# Allegro board ANALYSIS.brd
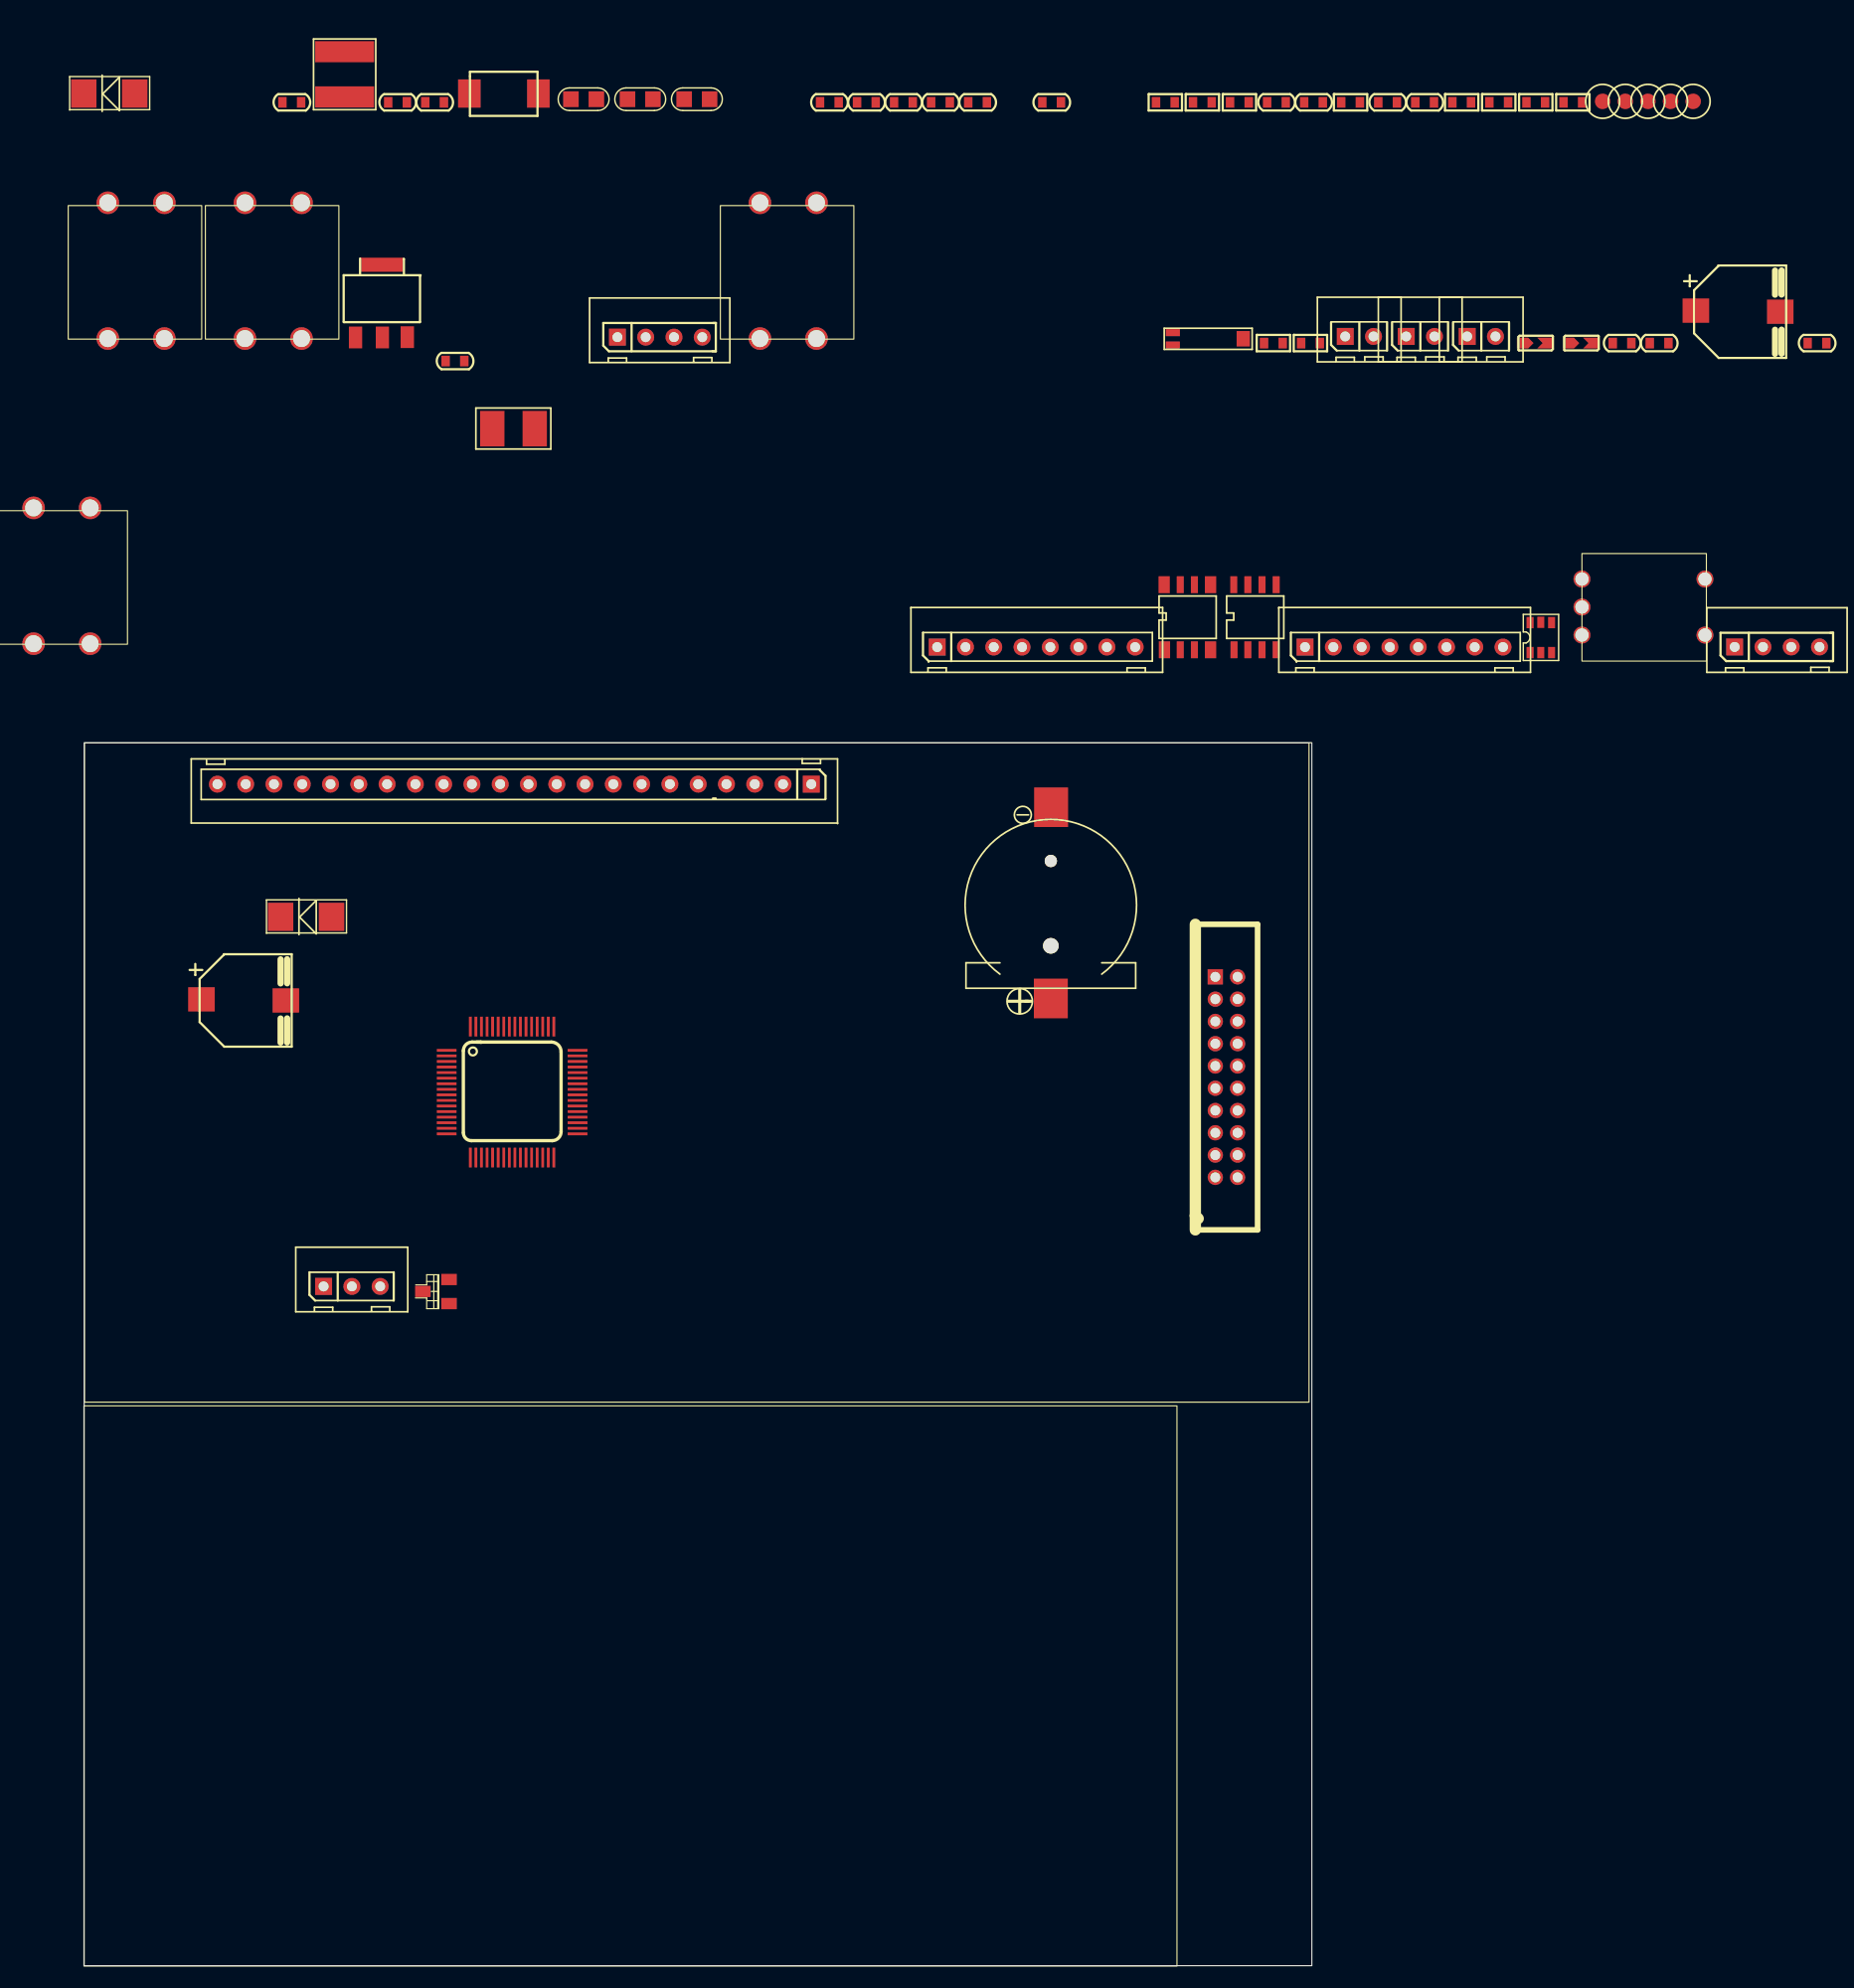
[diagram p0: board, top side]
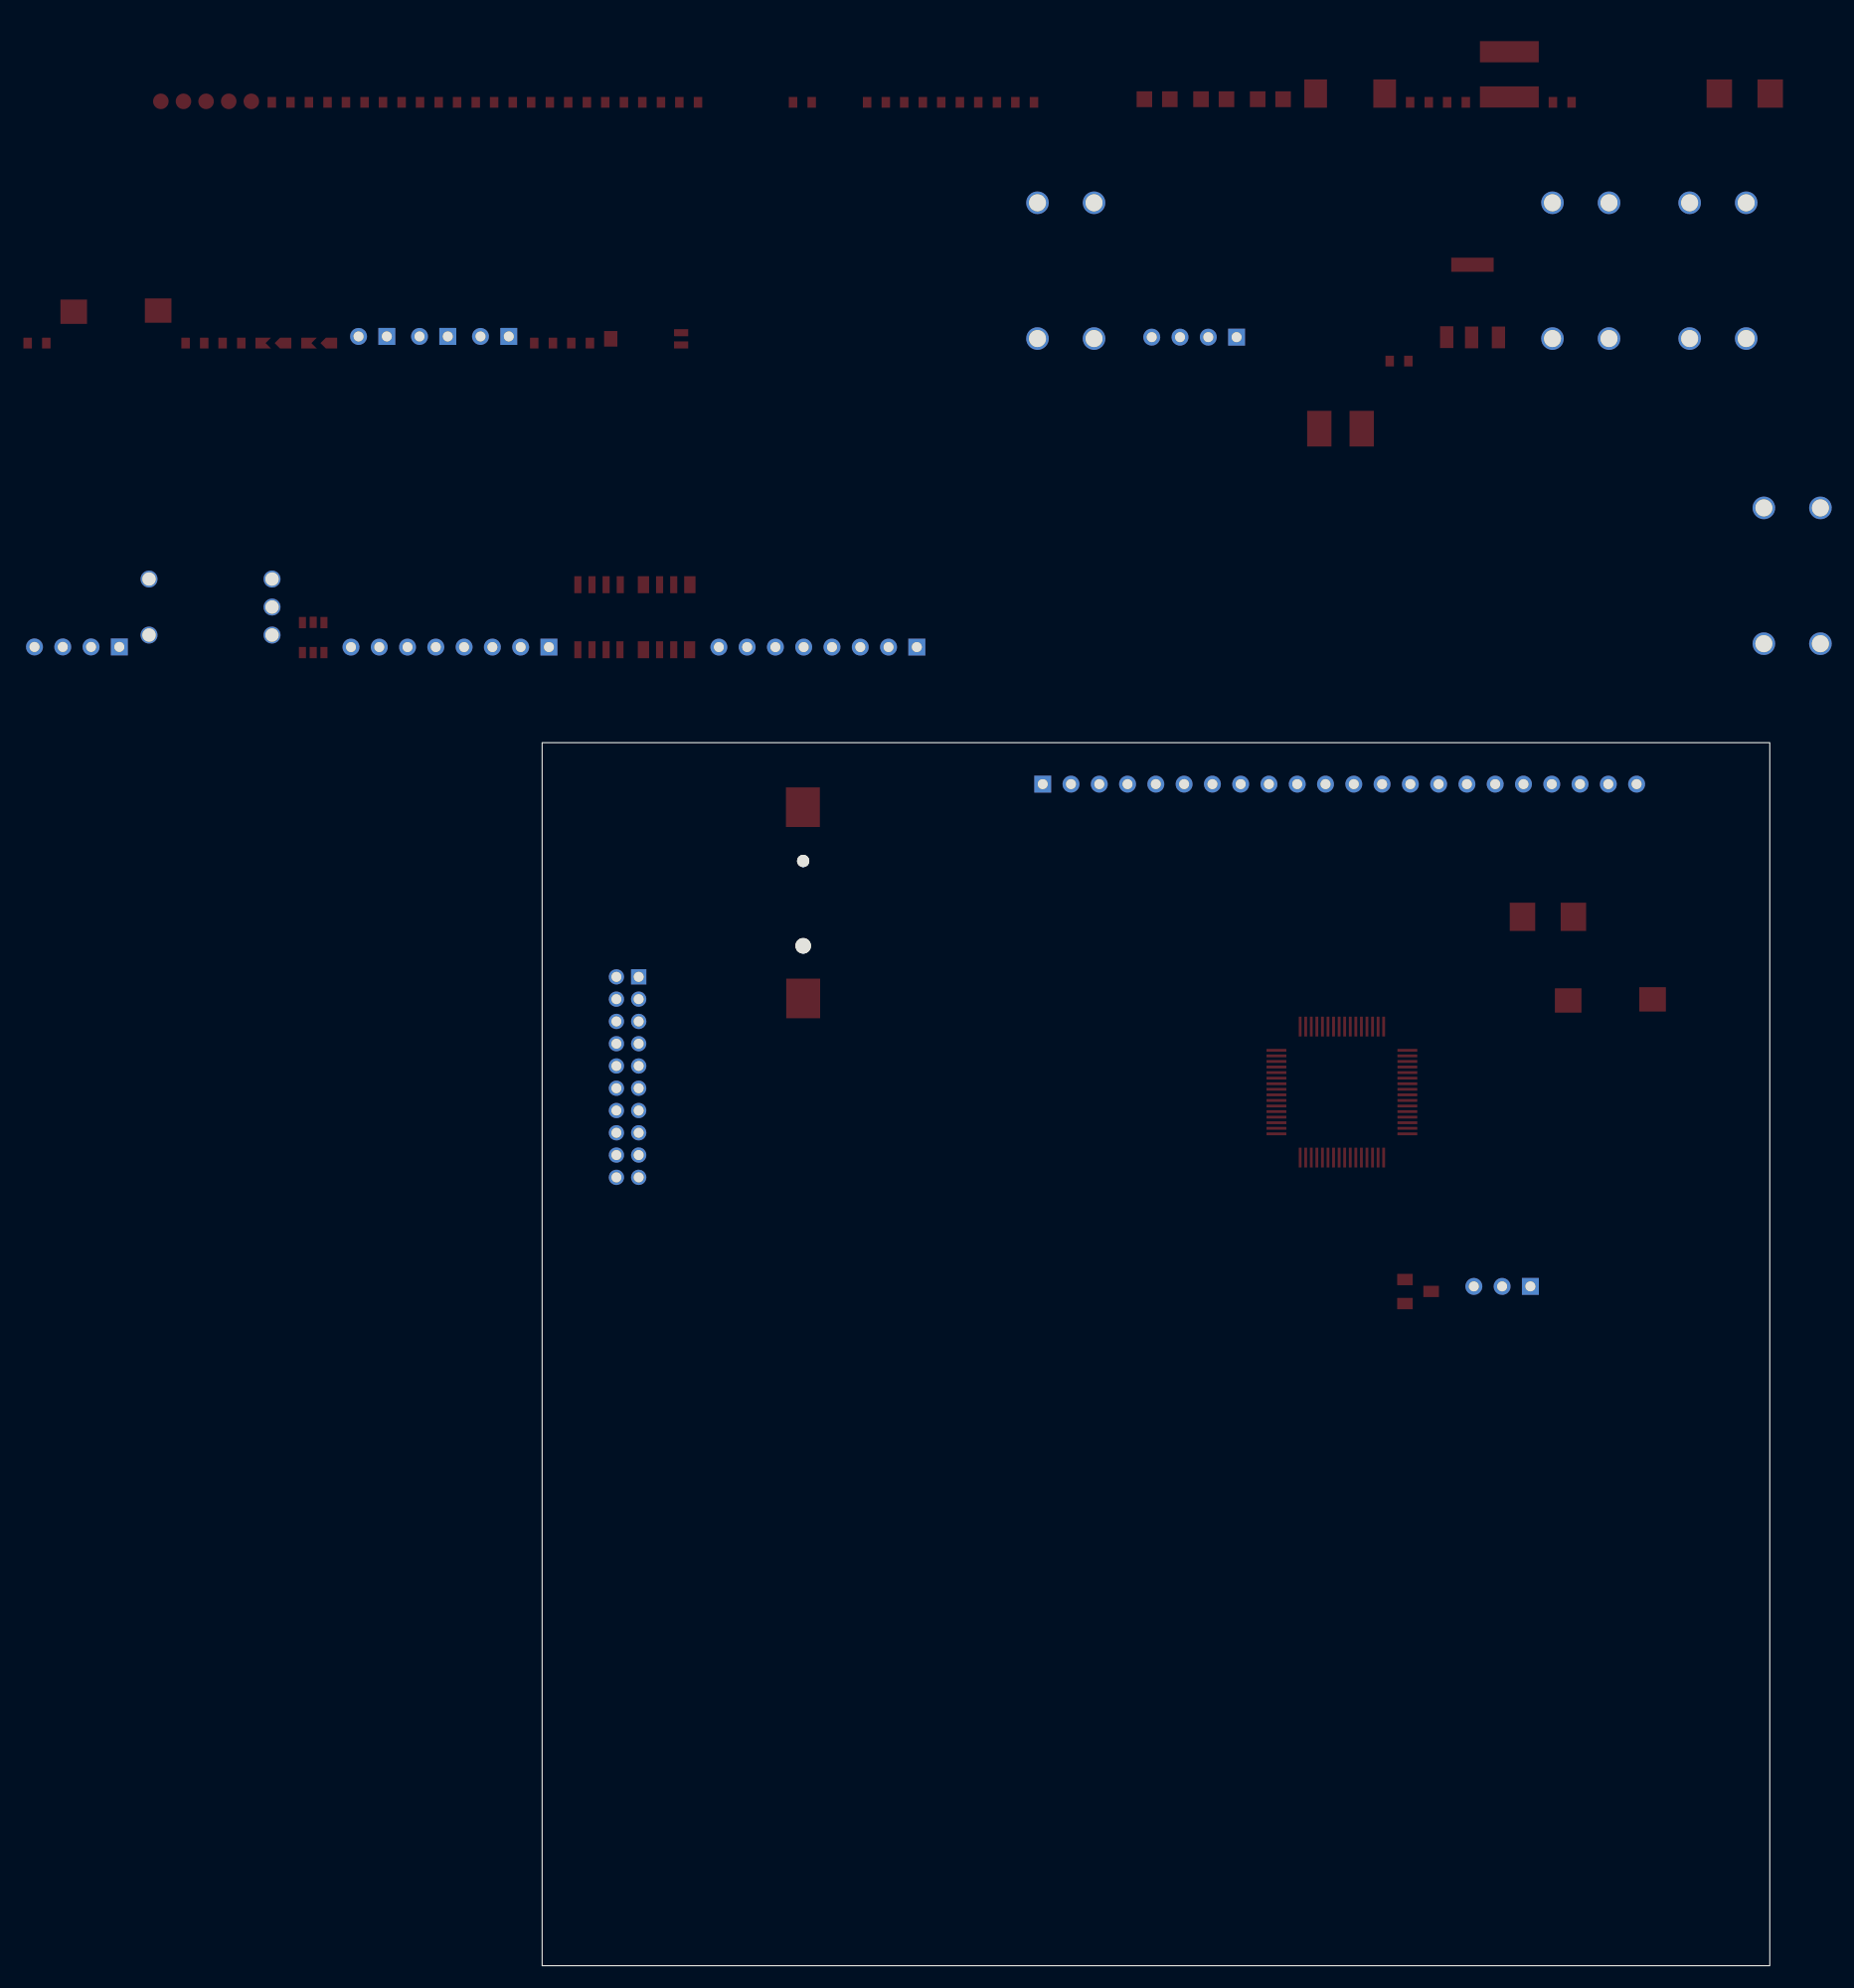
[diagram p1: board, bottom side, seen from below]

Outline 110.26 x 109.8 mm; copper layers: TOP, BOTTOM. Coordinates in mm from the lower left corner of the outline.
Outline path: rectangle 0,0 110.26,109.8

## Placement (name value [footprint] x y rotation side)
C1  0.1uF  [C0603]  70.25 167.3 0 top
C2  0.1uF  [C0603]  86.89 167.3 0 top
C3  0.1uF  [C0603]  18.64 167.3 0 top
C4  0.1uF  [C0603]  110.41 167.3 0 top
C5  0.1uF  [C0603]  28.14 167.3 0 top
C6  0.1uF  [C0603]  31.47 167.3 0 top
C7  15pF  [C0603]  117.06 167.3 0 top
C8  15pF  [C0603]  120.39 167.3 0 top
C9  0.1uF  [C0603]  66.92 167.3 0 top
C10  0.1uF  [C0603]  73.58 167.3 0 top
C11  0.1uF  [C0603]  107.08 167.3 0 top
C12  0.1uF  [C0603]  76.91 167.3 0 top
C13  5pF  [C0603]  141.45 145.68 0 top
C14  5pF  [C0603]  138.12 145.68 0 top
C15  220uf/35V  [CAP_SMD_8X10D5]  12.35 91.71 0 top
C16  0.1uF  [C0603]  80.23 167.3 0 top
C17  220uf/35V  [CAP_SMD_8X10D5]  146.57 153.55 0 top
C18  0.1uF  [C0603]  33.3 144.07 0 top
C19  10uF  [C0805]  44.85 167.58 0 top
C20  10uF  [C0805]  49.94 167.58 0 top
C21  10uF  [C0805]  55.03 167.58 0 top
C22  0.1uF  [C0603]  155.63 145.68 0 top
D1  BAT54C  [SOT23-3]  31.6 60.54 0 top
D2  SMBJ12A  [SMA]  2.25 168.08 0 top
D3  SS34  [SMA]  19.93 94.17 0 top
J1  HEADER 8  [XH-8A]  76.61 118.4 0 top
J2  HEADER 5  [SW3_2]  134.52 124.5 0 top
J3  -  [XH-2A]  124.21 146.28 0 top
J4  HEADER 20X2  [HEADER10X2_2MMP]  102.59 79.78 0 top
J5  HEADER 2  [XH-2A]  113.26 146.28 0 top
J6  0  [DEBUG0603_V1]  130.18 145.68 0 top
J7  0  [DEBUG0603_V1]  134.3 145.68 0 top
J8  HEADER 8  [XH-8A]  109.65 118.4 0 top
J9  LCD  [XH-22A]  62.36 119.33 180 top
JP_1  -  [XH-2A]  118.74 146.28 0 top
JP_SWD1  -  [XH-4A]  47.89 146.22 0 top
JS_BAT1  BAT  [CR1220_SOCKET_V1]  86.82 95.12 0 top
JS_USART1  NC/XH-4A  [XH-4A]  148.24 118.4 0 top
KS_REST  KEY_3x6x2d5_2p_SMD  [KEY_3X6X2D5_2P_SMD]  37.64 168.26 0 top
L1  47UH  [CD54]  23.39 169.81 0 top
R1  220K  [R0603]  110.13 145.68 0 top
R2  10K  [R0603]  127.05 167.3 0 top
R3  10K  [R0603]  130.37 167.3 0 top
R4  10K  [R0603]  100.43 167.3 0 top
R5  10K  [R0603]  97.1 167.3 0 top
R6  10K  [R0603]  133.7 167.3 0 top
R7  10K  [R0603]  103.75 167.3 0 top
R8  10R  [R0603]  106.81 145.68 0 top
R9  10k  [XH-3A]  21.5 60.99 0 top
R10  10K  [R0603]  113.74 167.3 0 top
R11  10K  [R0603]  123.72 167.3 0 top
SW1  SW PUSHBUTTON_0  [SW4L]  14.44 158.28 0 top
SW2  SW PUSHBUTTON_0  [SW4L]  2.12 158.28 0 top
SW3  SW PUSHBUTTON_0  [SW4L]  -4.55 130.89 0 top
SW4  SW PUSHBUTTON_0  [SW4L]  60.69 158.28 0 top
T1  NC/TEST  [TEST_55C_SMD]  140.44 167.39 0 top
T2  NC/TEST  [TEST_55C_SMD]  142.48 167.39 0 top
T3  NC/TEST  [TEST_55C_SMD]  144.51 167.39 0 top
T4  NC/TEST  [TEST_55C_SMD]  138.41 167.39 0 top
T5  NC/TEST  [TEST_55C_SMD]  136.38 167.39 0 top
U1  USBLC6-2SC6  [SOT23-6]  130.82 119.24 0 top
U2  STM32F103RB  [LQFP64]  38.43 78.44 0 top
U3  PCF8563T  [SOP8]  97.17 118.4 0 top
U4  XL1509-5.0  [SOIC8]  105.15 121.07 0 top
U5  LM1117-3.3  [SOT-223]  26.71 146.24 0 top
Y1  8M  [CY5032_2P]  38.56 138 0 top
Y2  32.768KHz  [MC_146]  100.95 146.07 0 top

## Library data of the parts
C1-C22 = C
D1 = BAT54C
D2 D3 = DIODE
J1 J8 = HEADER 10_0
J2 = 4 HEADER_1
J3 J5 = HEADER 2
J4 = HEADER 10X2_2
J6 J7 = JUMPER1_0
J9 = HEADER 22_0
JP_1 = header_3d5_6
JP_SWD1 JS_USART1 = HEADER 4
JS_BAT1 = BATT
KS_REST SW1-SW4 = SW PUSHBUTTON_0
L1 = INDUCTOR_0
R1-R8 R10 R11 = R
R9 = R_var_0
T1-T5 = TESTPONT
U1 = USB_MINI_SOCKET_5
U2 = STM32F103
U3 = PCF8563
U4 = XL1509
U5 = 1117
Y1 = CRYSTAL
Y2 = MC_146

## Footprints (pads in the part's own frame, mm; a bottom-side part is the same pattern mirrored in y, then rotated)
C0603
  rect 0.762x0.965 smd: 1(-0.838,0) 2(0.838,0)
C0805
  rect 1.397x1.422 smd: 1(-1.143,0) 2(1.143,0)
CAP_SMD_8X10D5
  rect 2.388x2.184 smd: 1(-1.82,-4.95) 2(5.76,-5.05)
CD54
  rect 5.283x1.905 smd: 1(0,2.032) 2(0,-2.032)
CR1220_SOCKET_V1
  round 1.397 hole 1.397 unplated: (0,-3.556)
  rect 3.048x3.556 smd: 1(0,-8.28) 2(0.025,8.89)
  round 1.092 hole 1.092: 3(0,4.064)
CY5032_2P
  rect 2.184x3.2 smd: 1(-1.905,0) 2(1.905,0)
DEBUG0603_V1
  custom 1.499x0.965 smd: 1(-0.762,0)
  custom 1.397x0.965 smd: 2(1.016,0)
HEADER10X2_2MMP
  rect 1.372x1.372 hole 0.889: 1(-1,9)
  round 1.372 hole 0.889: 2(1,9) 3(-1,7) 4(1,7) 5(-1,5) 6(1,5) 7(-1,3) 8(1,3) 9(-1,1) 10(1,1) 11(-1,-1) 12(1,-1) 13(-1,-3) 14(1,-3) 15(-1,-5) 16(1,-5) 17(-1,-7) 18(1,-7) 19(-1,-9) 20(1,-9)
KEY_3X6X2D5_2P_SMD
  rect 2.032x2.54 smd: 1(-3.048,-0.178) 2(3.15,-0.178)
LQFP64
  rect 1.778x0.254 smd: 1(-5.88,3.749) 2(-5.88,3.251) 3(-5.88,2.751) 4(-5.88,2.25) 5(-5.88,1.75) 6(-5.88,1.25) 7(-5.88,0.749) 8(-5.88,0.249) 9(-5.88,-0.249) 10(-5.88,-0.749) 11(-5.88,-1.25) 12(-5.88,-1.75) 13(-5.88,-2.25) 14(-5.88,-2.751) 15(-5.88,-3.251) 16(-5.88,-3.749) 33(5.88,-3.749) 34(5.88,-3.251) 35(5.88,-2.751) 36(5.88,-2.25) 37(5.88,-1.75) 38(5.88,-1.25) 39(5.88,-0.749) 40(5.88,-0.249) 41(5.88,0.249) 42(5.88,0.749) 43(5.88,1.25) 44(5.88,1.75) 45(5.88,2.25) 46(5.88,2.751) 47(5.88,3.251) 48(5.88,3.749)
  rect 0.254x1.778 smd: 17(-3.749,-5.88) 18(-3.251,-5.88) 19(-2.751,-5.88) 20(-2.25,-5.88) 21(-1.75,-5.88) 22(-1.25,-5.88) 23(-0.749,-5.88) 24(-0.249,-5.88) 25(0.249,-5.88) 26(0.749,-5.88) 27(1.25,-5.88) 28(1.75,-5.88) 29(2.25,-5.88) 30(2.751,-5.88) 31(3.251,-5.88) 32(3.749,-5.88) 49(3.749,5.88) 50(3.251,5.88) 51(2.751,5.88) 52(2.25,5.88) 53(1.75,5.88) 54(1.25,5.88) 55(0.749,5.88) 56(0.249,5.88) 57(-0.249,5.88) 58(-0.749,5.88) 59(-1.25,5.88) 60(-1.75,5.88) 61(-2.25,5.88) 62(-2.751,5.88) 63(-3.251,5.88) 64(-3.749,5.88)
MC_146
  rect 1.27x0.635 smd: 1(-3.173,0.55) 2(-3.173,-0.55)
  rect 1.194x1.397 smd: 3(3.15,0)
R0603
  rect 0.762x0.965 smd: 1(-0.838,0) 2(0.838,0)
SMA
  rect 2.286x2.54 smd: 1(2.286,0) 2(-2.286,0)
SOIC8
  rect 0.635x1.524 smd: 1(-1.88,-2.921) 2(-0.635,-2.921) 3(0.635,-2.921) 4(1.905,-2.921) 5(1.905,2.921) 6(0.635,2.921) 7(-0.635,2.921) 8(-1.905,2.921)
SOP8
  rect 1.016x1.524 smd: 1(-0.152,-0.254) 4(3.988,-0.254) 5(3.988,5.588) 8(-0.178,5.588)
  rect 0.635x1.524 smd: 2(1.27,-0.254) 3(2.54,-0.254) 6(2.54,5.588) 7(1.27,5.588)
SOT23-3
  rect 1.397x1.016 smd: 1(1.168,-1.092) 2(1.168,1.067) 3(-1.181,0)
SOT23-6
  rect 0.635x1.016 smd: 1(-0.965,-1.346) 2(0,-1.346) 3(0.965,-1.346) 4(0.965,1.346) 5(0,1.372) 6(-0.965,1.346)
SOT-223
  rect 1.194x1.956 smd: 1(-2.337,-0.051) 2(0.076,-0.051) 3(2.311,-0.025)
  rect 3.81x1.27 smd: 4(0,6.477)
SW3_2
  round 1.524 hole 1.194: 1(0,0) 2(0,-2.515) 3(0,-5.029) 4(11.049,0) 5(11.049,-5.029)
SW4L
  round 2.032 hole 1.524: 1(0,0) 2(0,-12.192) 3(5.08,0) 4(5.08,-12.192)
TEST_55C_SMD
  round 1.397 smd: 1(0,0)
XH-2A
  rect 1.524x1.524 hole 0.889: 1(0,0)
  round 1.524 hole 0.889: 2(2.54,0)
XH-3A
  rect 1.524x1.524 hole 0.889: 1(0,0)
  round 1.524 hole 0.889: 2(2.54,0) 3(5.08,0)
XH-4A
  rect 1.524x1.524 hole 0.889: 1(0,0)
  round 1.524 hole 0.889: 2(2.54,0) 3(5.08,0) 4(7.62,0)
XH-8A
  rect 1.524x1.524 hole 0.889: 1(0.005,-0.013)
  round 1.524 hole 0.889: 2(2.545,-0.013) 3(5.085,-0.013) 4(7.625,-0.013) 5(10.165,-0.013) 6(12.705,-0.013) 7(15.245,-0.013) 8(17.785,-0.013)
XH-22A
  rect 1.524x1.524 hole 0.889: 1(-2.942,13.25)
  round 1.524 hole 0.889: 2(-0.402,13.25) 3(2.138,13.25) 4(4.678,13.25) 5(7.218,13.25) 6(9.758,13.25) 7(12.298,13.25) 8(14.838,13.25) 9(17.378,13.25) 10(19.918,13.25) 11(22.458,13.25) 12(24.998,13.25) 13(27.538,13.25) 14(30.078,13.25) 15(32.618,13.25) 16(35.158,13.25) 17(37.698,13.25) 18(40.238,13.25) 19(42.778,13.25) 20(45.318,13.25) 21(47.858,13.25) 22(50.398,13.25)

## Nets
GND: C1.2 C2.2 C3.2 C4.1 C4.2 C5.2 C6.2 C7.1 C8.1 C9.1 C10.2 C11.2 C12.2 C13.1 C14.1 C15.2 C16.1 C17.2 C18.1 C19.1 C20.1 C21.1 C22.1 D2.1 D3.1 J1.1 J2.2(G1) J2.5(G2) J3.2 J4.16(GND) J5.2 J8.1 J9.1(VSS) J9.22(LEDK) JP_1.2 JP_SWD1.1 JS_BAT1.2(-) JS_USART1.1 KS_REST.2 R4.1 R5.1 R9.2 SW1.3 SW1.4 SW2.3 SW2.4 SW3.3 SW3.4 SW4.3 SW4.4 U1.2(GND) U2.12(VSSA) U2.18(VSS_4) U2.31(VSS_1) U2.47(VSS_2) U2.63(VSS_3) U3.4(VSS) U4.4(EN) U4.5(GND1) U4.6(GND2) U4.7(GND3) U4.8(GND4) U5.1 Y2.3(GND)
VBAT_CR1220: D1.1(C1) JS_BAT1.1(+)
VCC_5V: C17.1 C18.2 C19.2 C21.2 J3.1 J7.2 J9.2(VDD) J9.8(CS2) J9.21(LEDA) L1.1 U4.3(FB) U5.3(IN)
VCC_9V: C15.1 C16.2 D2.2 JP_1.1 U4.1(VIN)
VDD_3V3: C1.1 C2.1 C3.1 C6.1 C20.2 C22.2 D1.2(C2) J6.2 R1.2 R8.2 R10.1 R11.1 U1.5(VBUS) U2.1(VBAT) U2.13(VDDA) U2.19(VDD_4) U2.32(VDD_1) U2.48(VDD_2) U2.64(VDD_3) U5.2(OUT) U5.4
/CS1: J9.7(/CS1) U2.36(PB15/TIM1_CH3N/SPI2_MOSI)
/RD: J9.6(/RD) U2.35(PB14/TIM1_CH2N/SPI2_MISO)
/RST: J9.11(/RST)
/WR: J9.5(/WR) U2.34(PB13/TIM1_CH1N/SPI2_SCK)
BOOT0: R4.2 U2.60(BOOT0)
BOOT1: R5.2 U2.28(PB2/BOOT1)
BUSY: J9.9(BUSY) U2.39(PC8/TIM3_CH3)
DB0: J9.12(DB0) U2.8(PC0/ADC12_IN10)
DB1: J9.13(DB1) U2.9(PC1/ADC12_IN11)
DB2: J9.14(DB2) U2.10(PC2/ADC12_IN12)
DB3: J9.15(DB3) U2.11(PC3/ADC12_IN13)
DB4: J9.16(DB4) U2.24(PC4/ADC12_IN14)
DB5: J9.17(DB5) U2.25(PC5/ADC12_IN15)
DB6: J9.18(DB6) U2.37(PC6/TIM3_CH1)
DB7: J9.19(DB7) U2.38(PC7/TIM3_CH2)
EC11_A: C11.1 R3.1 R6.2 U2.44(PA11/USART1_CTS/CANRX/TIM1_CH4/)
EC11_B: C10.1 R2.1 R7.2 U2.45(PA12/USART1_RTS/CANTX/TIM1_ETR/)
EC11_C: J8.8 U2.50(PA15/JTDI/TIM2_CH1_ETR/SPI1_NSS)
EC11_K: J1.8 J2.4(KEY)
I2C1_SCL: R10.2 U2.61(PB8/I2C1_SCL/CANRX) U3.6(SCL)
I2C1_SDA: R11.2 U2.62(PB9/I2C1_SDA/CANTX) U3.5(SDA)
KEY1: J1.2 SW1.1
KEY2: J1.3 SW2.1
KEY3: J1.4 SW3.1
KEY4: J1.5 SW4.1
KEY_1: J8.2 U2.15(PA1/USART2_RTS/ADC12_IN1/TIM2_C)
KEY_2: J8.3 U2.16(PA2/USART2_TX/ADC12_IN2/TIM2_CH)
KEY_3: J8.4 U2.17(PA3/USART2_RX/ADC12_IN3/TIM2_CH)
KEY_4: J8.5 U2.20(PA4/SPI1_NSS/USART2_CK/ADC12_IN)
LCD_INT: J9.10(INT) U2.40(PC9/TIM3_CH4)
RS: J9.4(RS) U2.33(PB12/TIM1_BKIN/SPI2_NSS)
RTC_CLKOUT: U2.52(PC11) U3.7(CLKOUT)
RTC_INT: U2.51(PC10) U3.3(I\N\T\)
STM32_REST: C9.2 KS_REST.1 U2.7(NRST)
SWCLK: JP_SWD1.2 T2.1 U2.49(PA14/JTCK/SWCLK)
SWDIO: JP_SWD1.3 T1.1 U2.46(PA13/JTMS/SWDIO)
USART1_RX_PA10: JS_USART1.3 T4.1 U2.43(PA10/USART1_RX/TIM1_CH3)
USART1_TX_PA9: JS_USART1.2 T5.1 U2.42(PA9/USART1_TX/TIM1_CH2)
USART3_RXD: J4.19(TXD) U2.30(PB11/TIM2_CH4/USART3_RX)
USART3_TXD: J4.20(RXD) U2.29(PB10/TIM2_CH3/USART3_TX)
N201627: C12.1 D1.3(A) T3.1 U3.8(VDD)
N201649: C14.2 U3.1(OSCI) Y2.2
N202031: JP_SWD1.4 R8.1
N202175: C7.2 U2.6(PD1 OSC_OUT/CANTX) Y1.2
N202187: C8.2 U2.5(PD0 OSC_IN/CANRX) Y1.1
N203157: C13.2 U3.2(OSCO) Y2.1
N208876: D3.2 L1.2 U4.2(OUTPUT)
N211508: U1.1(I/O1) U2.14(PA0-WKUP/USART2_CTS/ADC12_IN0/T)
N214712: C5.1 J5.1 R1.1 U1.6(I/O1X)
N215803: J6.1 J7.1 R2.2 R3.2
N217465: J8.7 R7.1
N217476: J8.6 R6.1
N232878: J9.3(V0) R9.3
N232980: J9.20(VEE) R9.1
N235811: J1.7 J2.3(B)
N235857: J1.6 J2.1(A)

Pads without a net: J4 1 2 3 4 5 6 7 8 9 10 11 12 13 14 15 17 18; JS_BAT1 3; JS_USART1 4; SW1 2; SW2 2; SW3 2; SW4 2; U1 3 4; U2 2 3 4 21 22 23 26 27 41 53 54 55 56 57 58 59

## Text on the board
DIMENSION: FIGURE | SIZE | 12.0 | 14.0 | 24.0 | 35.0 | 60.0 | 65.0 | 137.795 | 118.11x39.37 | DRILL CHART: TOP to BOTTOM | ALL UNITS ARE IN MILS | PLATED | QTY | 38 | 381 | 42 | 37 | 11 | 24 | 12 | 2 | 1
